# Altium PCB Main.PcbDoc
Units mil, origin at the board's own origin, x right, y up, seen from the top; angles counter-clockwise.
Board outline 3600 x 800 mil, 2 copper layers (Top Layer, Bottom Layer); 19 components, 18 nets, 68 pads, 12 vias.
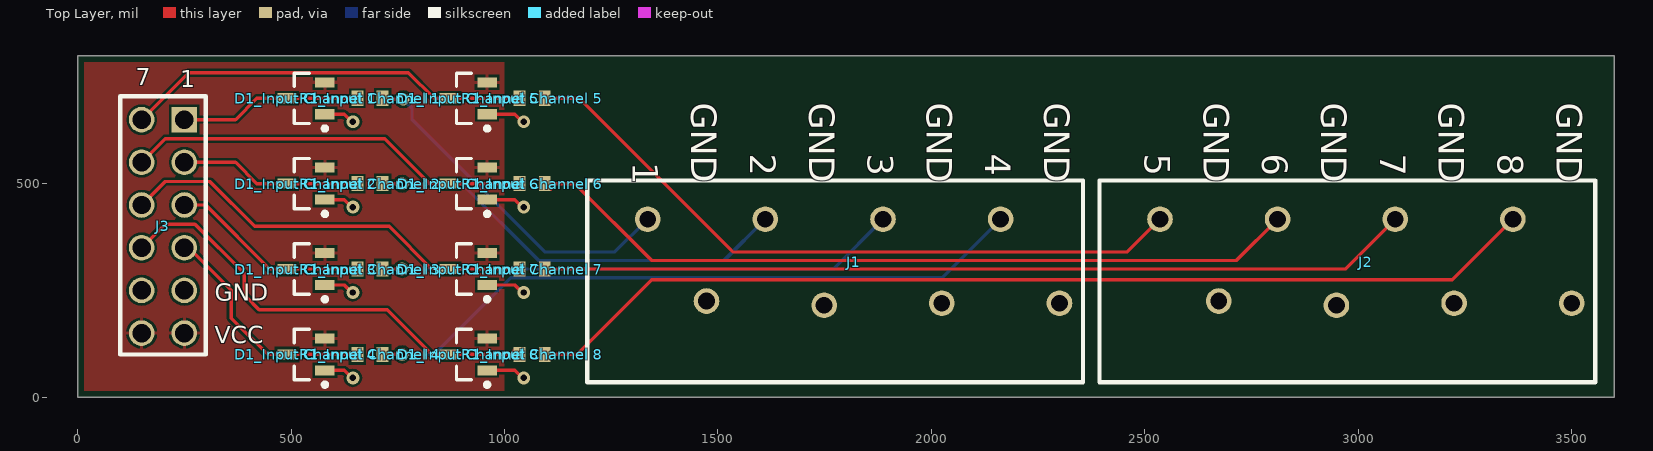
[diagram p0: Top Layer view]
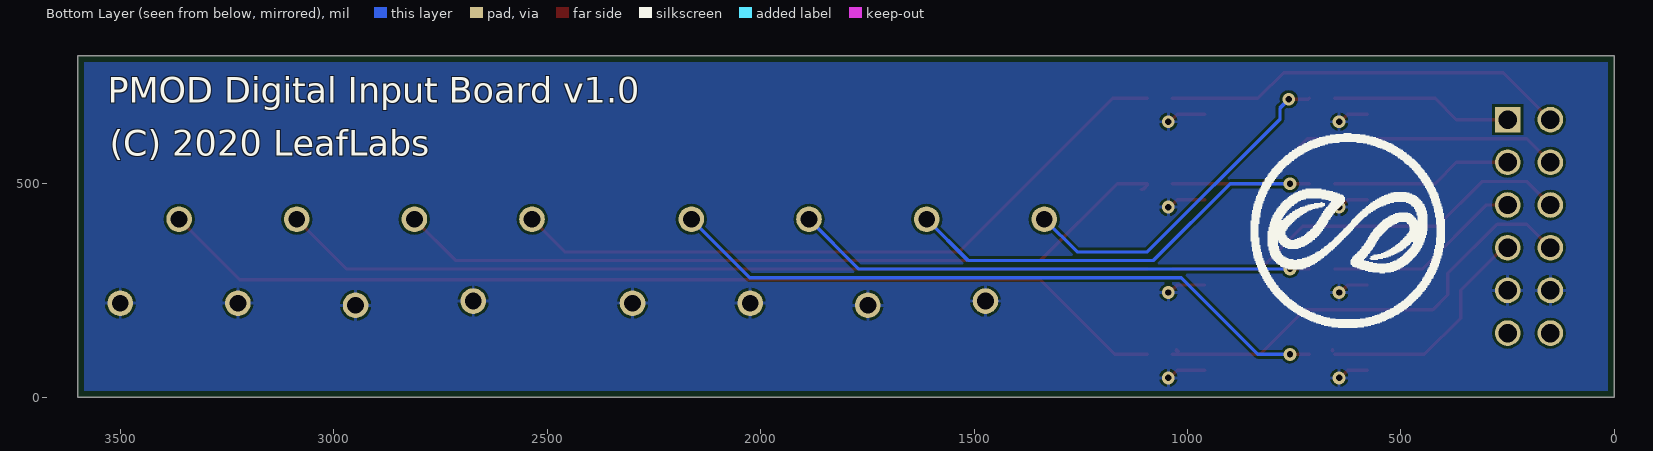
[diagram p1: Bottom Layer view, seen from below]

## Layer stack, top to bottom
Top Solder: solder mask 0.4, Solder Resist, Dk 3.5
Top Layer: signal copper 1.4
Dielectric 1: dielectric 12.6, FR-4, Dk 4.8
Bottom Layer: signal copper 1.4
Bottom Solder: solder mask 0.4, Solder Resist, Dk 3.5

## Board outline
0,0 3600,0 3600,800 0,800

## Design rules (kind name [scope] priority, off if disabled: settings)
BoardOutlineClearance [All] p1: gap=15 ignorepadtopadclearanceinfootprint=FALSE
Clearance [All] p1: gap=6 ignorepadtopadclearanceinfootprint=FALSE except(0: Arc-Hole Track-Hole SMDPad-Hole THPad-Hole Via-Hole Fill-Hole Poly-Hole Region-Hole Text-Hole)
ComponentClearance [All] p1: gap=1 collisioncheckmode=3 verticalgap=1 showdistances=FALSE
DiffPairsRouting [All] p1: maxlimit=393.7 minlimit=6 mostfreqgap=8 toplayer_minwidth=6 toplayer_maxwidth=15 toplayer_prefwidth=8 bottomlayer_minwidth=6 bottomlayer_maxwidth=15 bottomlayer_prefwidth=8 maxuncoupledlength=500
HoleSize [All] p1: absolutevalues=TRUE maxlimit=265 minlimit=13 maxpercent=80.000 minpercent=20.000
HoleToHoleClearance [All] p1: gap=10 allowstackedmicrovias=FALSE
MinimumAnnularRing [All] p1: minimumring=7
MinimumSolderMaskSliver [All] p1: minsoldermaskwidth=0
PlaneClearance [All] p1: clearance=10
PlaneConnect [All] p1: planeconnectstyle=Direct reliefexpansion=16 reliefentries=4 reliefconductorwidth=6 reliefairgap=6
PolygonConnect [All] p1: connectstyle=Relief reliefconductorwidth=8 reliefentries=4 polygonreliefangle="90 Angle" airgapwidth=6
RoomDefinition Main [InComponentClass('Main')] p1: confinementstyle=ConfineOut formatcopy=TRUE lockcomponents=FALSE outline 1150,-1000 3150,-1000 3150,0 1150,0
RoomDefinition "Input Channel 8" [InComponentClass('Input Channel 8')] p2: confinementstyle=ConfineOut formatcopy=TRUE lockcomponents=FALSE outline 1160,-1000 3160,-1000 3160,0 1160,0
RoomDefinition "Input Channel 7" [InComponentClass('Input Channel 7')] p3: confinementstyle=ConfineOut formatcopy=TRUE lockcomponents=FALSE outline 1210,-1000 3210,-1000 3210,0 1210,0
RoomDefinition "Input Channel 6" [InComponentClass('Input Channel 6')] p4: confinementstyle=ConfineOut formatcopy=TRUE lockcomponents=FALSE outline 1200,-1000 3200,-1000 3200,0 1200,0
RoomDefinition "Input Channel 5" [InComponentClass('Input Channel 5')] p5: confinementstyle=ConfineOut formatcopy=TRUE lockcomponents=FALSE outline 1235,-1000 3235,-1000 3235,0 1235,0
RoomDefinition "Input Channel 4" [InComponentClass('Input Channel 4')] p6: confinementstyle=ConfineOut formatcopy=TRUE lockcomponents=FALSE outline 1140,-1000 3140,-1000 3140,0 1140,0
RoomDefinition "Input Channel 3" [InComponentClass('Input Channel 3')] p7: confinementstyle=ConfineOut formatcopy=TRUE lockcomponents=FALSE outline 1255,-1000 3255,-1000 3255,0 1255,0
RoomDefinition "Input Channel 2" [InComponentClass('Input Channel 2')] p8: confinementstyle=ConfineOut formatcopy=TRUE lockcomponents=FALSE outline 1230,-1000 3230,-1000 3230,0 1230,0
RoomDefinition "Input Channel 1" [InComponentClass('Input Channel 1')] p9: confinementstyle=ConfineOut formatcopy=TRUE lockcomponents=FALSE outline 1205,-1000 3205,-1000 3205,0 1205,0
RoutingCorners [All] p1: cornerstyle=45-Degree minsetback=49.21 maxsetback=49.21
RoutingVias [All] p1: holewidth=15 width=30 viastyle="Through Hole" minholewidth=13 minwidth=27 maxholewidth=100 maxwidth=114
SilkToSilkClearance [All] p1: silktosilkclearance=0
SilkToSolderMaskClearance [IsPad] p1: minsilkscreentomaskgap=6 clearancetoexposedcopper=TRUE
SolderMaskExpansion [All] p1: expansion=2.95 istentingtop=FALSE
Width [All] p1: maxlimit=400 minlimit=6 preferedwidth=8
20 further rules are at their usual default settings.

## Classes and differential pairs
channel class digital_input_shifter: "Input Channel 1" "Input Channel 2" "Input Channel 3" "Input Channel 4" "Input Channel 5" "Input Channel 6" "Input Channel 7" "Input Channel 8"
component class Main: J1 J2 J3
component class "Input Channel 8": "D1_Input Channel 8" "R1_Input Channel 8"
component class "Input Channel 7": "D1_Input Channel 7" "R1_Input Channel 7"
component class "Input Channel 6": "D1_Input Channel 6" "R1_Input Channel 6"
component class "Input Channel 5": "D1_Input Channel 5" "R1_Input Channel 5"
component class "Input Channel 4": "D1_Input Channel 4" "R1_Input Channel 4"
component class "Input Channel 3": "D1_Input Channel 3" "R1_Input Channel 3"
component class "Input Channel 2": "D1_Input Channel 2" "R1_Input Channel 2"
component class "Input Channel 1": "D1_Input Channel 1" "R1_Input Channel 1"

## Components (designator, comment, footprint, x,y, rotation, side; value= is the part's Value field where it differs from the comment)
"D1_Input Channel 1" "SDM40E20LS-7-F" SOT-23_N 535,700 r180 top (schematic designator D1)
"D1_Input Channel 2" "SDM40E20LS-7-F" SOT-23_N 535,500 r180 top (schematic designator D1)
"D1_Input Channel 3" "SDM40E20LS-7-F" SOT-23_N 535,300 r180 top (schematic designator D1)
"D1_Input Channel 4" "SDM40E20LS-7-F" SOT-23_N 535,100 r180 top (schematic designator D1)
"D1_Input Channel 5" "SDM40E20LS-7-F" SOT-23_N 915,700 r180 top (schematic designator D1)
"D1_Input Channel 6" "SDM40E20LS-7-F" SOT-23_N 915,500 r180 top (schematic designator D1)
"D1_Input Channel 7" "SDM40E20LS-7-F" SOT-23_N 915,300 r180 top (schematic designator D1)
"D1_Input Channel 8" "SDM40E20LS-7-F" SOT-23_N 915,100 r180 top (schematic designator D1)
J1 "Phoenix Teminal Block" PHOENIX_8 2300,220 r270 top
J2 "Phoenix Teminal Block" PHOENIX_8 3500,220 r270 top
J3 "PMOD" PMOD_6x2_male 250,650 r0 top
"R1_Input Channel 1" "Res3" J1-0603 685,700 r180 top value=470 (schematic designator R1)
"R1_Input Channel 2" "Res3" J1-0603 685,500 r180 top value=470 (schematic designator R1)
"R1_Input Channel 3" "Res3" J1-0603 685,300 r180 top value=470 (schematic designator R1)
"R1_Input Channel 4" "Res3" J1-0603 685,100 r180 top value=470 (schematic designator R1)
"R1_Input Channel 5" "Res3" J1-0603 1065,700 r180 top value=470 (schematic designator R1)
"R1_Input Channel 6" "Res3" J1-0603 1065,500 r180 top value=470 (schematic designator R1)
"R1_Input Channel 7" "Res3" J1-0603 1065,300 r180 top value=470 (schematic designator R1)
"R1_Input Channel 8" "Res3" J1-0603 1065,100 r180 top value=470 (schematic designator R1)

## Footprints (in the part's own frame and the unit in brackets; to place one, negate y for a bottom-side part, rotate by r counter-clockwise, add the part's x,y. Pads: shape width x height; smd on the part's side, far side on the other; paste and mask are expansions set on the pad)
J1-0603 [mm] "Chip Resistor, Body 1.6x0.8mm, IPC High Density"
  rect 0.7x0.9 smd: 1(-0.75,0) 2(0.75,0)
  body extent -0.85,-0.48 0.85,0.48, height 0.9
PHOENIX_8 [mm]
  round 1.524 hole 1: 1(-5,-24.5) 2(-0.127,-21) 3(-5,-17.5) 4(0.127,-14) 5(-5,-10.5) 6(0,-7) 7(-5,-3.5) 8(0,0)
  silkscreen extent -7.3,-28.1 4.7,1.4, body extent -7.27,-27.81 4.73,1.69, height 13.1
PMOD_6x2_male [mil]
  rect 60x60 hole 43.31: 1(0,0)
  round 60 hole 43.31: 2(0,-100) 3(0,-200) 4(0,-300) 5(0,-400) 6(0,-500) 7(-100,0) 8(-100,-100) 9(-100,-200) 10(-100,-300) 11(-100,-400) 12(-100,-500)
  silkscreen extent -150,-550 50,55, body extent -495,-550 13,50, height 200
SOT-23_N [mm] "SOT23, 3-Leads, Body 2.9x1.3mm, Pitch 0.95mm, Lead Span 2.5mm, IPC Medium Density"
  rect 1.15x0.6 smd: 1(-1.125,0.95) 2(-1.125,-0.95) 3(1.125,0)
  silkscreen extent -1.25,-1.5 0.7,1.92, body extent -0.7,-1.5 0.7,1.5, height 1.1

## Part data
"D1_Input Channel 1" "D1_Input Channel 2" "D1_Input Channel 3" "D1_Input Channel 4" "D1_Input Channel 5" "D1_Input Channel 6" "D1_Input Channel 7" "D1_Input Channel 8": "SDM40E20LS-7-F schottky series pair diode.", Supplier Part Number 1=SDM40E20LS-FDICT-ND, Supplier 1=Digi-Key
J1 J2: Supplier Part Number 1=277-1628-ND, Supplier 1=Digi-Key
J3: library part "PMOD Male 2-row", "2x6 PMOD right angle board connector."
"R1_Input Channel 1" "R1_Input Channel 2" "R1_Input Channel 3" "R1_Input Channel 4" "R1_Input Channel 5" "R1_Input Channel 6" "R1_Input Channel 7" "R1_Input Channel 8": "Resistor", Supplier Part Number 1=P470BZCT-ND, LatestRevisionDate=29-May-2009, LatestRevisionNote="IPC-7351 Footprint Added.", PackageDescription="Chip Resistor", PackageReference=J1-0603, Published=8-Jun-2000, Publisher="Altium Limited", Supplier 1=Digi-Key

## Via types
v1: diameter 30, hole 15, Top Layer to Bottom Layer, tented both sides, 12 vias

## Nets (pads, with @x,y where several pads share a name; then routed paths per layer and width w, separated by ;. In a path a pad name is that pad's centre, name@x,y a point inside that pad or via, vN(x,y) a via of type N, cw(c..) or ccw(c..) an arc to the next point about the centre after c; other vN are vias at no path point)
3.3V: "D1_Input Channel 1.2" "D1_Input Channel 2.2" "D1_Input Channel 3.2" "D1_Input Channel 4.2" "D1_Input Channel 5.2" "D1_Input Channel 6.2" "D1_Input Channel 7.2" "D1_Input Channel 8.2" J3.6 J3.12
GND: "D1_Input Channel 1.1" "D1_Input Channel 2.1" "D1_Input Channel 3.1" "D1_Input Channel 4.1" "D1_Input Channel 5.1" "D1_Input Channel 6.1" "D1_Input Channel 7.1" "D1_Input Channel 8.1" J1.2 J1.4 J1.6 J1.8 J2.2 J2.4 J2.6 J2.8 J3.5 J3.11 | length 664
  Top Layer w8: 579.29,62.6 624.41,62.6 642.01,45 v1(645,45) ; 579.29,262.6 624.41,262.6 642.01,245 v1(645,245) ; 579.29,462.6 624.41,462.6 642.01,445 v1(645,445) ; 579.29,662.6 624.41,662.6 642.01,645 v1(645,645) ; 959.29,62.6 1024.41,62.6 1042.01,45 v1(1045,45) ; 959.29,262.6 1024.41,262.6 1042.01,245 v1(1045,245) ; 959.29,462.6 1024.41,462.6 1042.01,445 v1(1045,445) ; 959.29,662.6 1024.41,662.6 1042.01,645 v1(1045,645)
"NetD1_Input Channel 1_3": "D1_Input Channel 1.3" "R1_Input Channel 1.2" J3.1 | length 426.2
  Top Layer w8: J3.1 370,650 420,700 579.29,700 655.47,700
"NetD1_Input Channel 2_3": "D1_Input Channel 2.3" "R1_Input Channel 2.2" J3.2 | length 426.2
  Top Layer w8: J3.2 370,550 420,500 579.29,500 655.47,500
"NetD1_Input Channel 3_3": "D1_Input Channel 3.3" "R1_Input Channel 3.2" J3.3 | length 467.6
  Top Layer w8: J3.3 300,450 450,300 579.29,300 655.47,300
"NetD1_Input Channel 4_3": "D1_Input Channel 4.3" "R1_Input Channel 4.2" J3.4 | length 547.1
  Top Layer w8: J3.4 260,350 360,250 360,185 445,100 579.29,100 655.47,100
"NetD1_Input Channel 5_3": "D1_Input Channel 5.3" "R1_Input Channel 5.2" J3.7 | length 955.9
  Top Layer w8: J3.7 260,760 775,760 835,700 959.29,700 1035.47,700
"NetD1_Input Channel 6_3": "D1_Input Channel 6.3" "R1_Input Channel 6.2" J3.8 | length 951.7
  Top Layer w8: J3.8 205,605 720,605 825,500 959.29,500 1035.47,500
"NetD1_Input Channel 7_3": "D1_Input Channel 7.3" "R1_Input Channel 7.2" J3.9 | length 993.2
  Top Layer w8: J3.9 205,505 310,505 415,400 730,400 830,300 959.29,300 1035.47,300
"NetD1_Input Channel 8_3": "D1_Input Channel 8.3" "R1_Input Channel 8.2" J3.10 | length 1067.7
  Top Layer w8: J3.10 205,405 275,405 390,290 390,239.69 394.69,235 395,235 425,205 725,205 830,100 959.29,100 1035.47,100
  Top Layer w10: 1022.87,107.4 1025.47,110
NetJ1_1: "R1_Input Channel 1.1" J1.1 | length 817.1
  Top Layer w8: 714.53,700 716.82,697.7 v1(762.96,697.7)
  Bottom Layer w8: v1(762.96,697.7) 783.41,677.26 783.41,651.24 1094.64,340 1258.58,340 J1.1
NetJ1_3: "R1_Input Channel 2.1" J1.3 | length 1011.2
  Top Layer w8: 714.53,500 v1(760,500)
  Bottom Layer w8: v1(760,500) 900,500 1080,320 1514.17,320 J1.3
NetJ1_5: "R1_Input Channel 3.1" J1.5 | length 1220.5
  Top Layer w8: 714.53,300 v1(760,300)
  Bottom Layer w8: v1(760,300) 1769.76,300 J1.5
NetJ1_7: "R1_Input Channel 4.1" J1.7 | length 1578.9
  Top Layer w8: 714.53,100 v1(760,100)
  Bottom Layer w8: v1(760,100) 835,100 1015,280 2025.35,280 J1.7
NetJ2_1: "R1_Input Channel 5.1" J2.1 | length 1621.9
  Top Layer w8: 1094.53,700 1175,700 1535,340 2458.58,340 J2.1
NetJ2_3: "R1_Input Channel 6.1" J2.3 | length 1852.9
  Top Layer w8: 1108.24,486.28 1104.31,486.28 1094.53,496.06 1094.53,500 1140,500 1165,500 1345,320 2714.17,320 J2.3
NetJ2_5: "R1_Input Channel 7.1" J2.5 | length 2040.5
  Top Layer w8: 1094.53,300 2969.76,300 J2.5
NetJ2_7: "R1_Input Channel 8.1" J2.7 | length 2398.9
  Top Layer w8: 1094.53,100 1170,100 1345,275 3220.35,275 J2.7

## Polygon pours and split planes (outlines as drawn)
3.3V on Top Layer "3.3V_L01_P010" (solid, pour order 10): 15,15 15,785 1000,785 1000,15
no net on Top Layer "NONET_L01_P000" (solid, pour order 0): 35,780
GND on Bottom Layer "GND_L02_P011" (solid, pour order 11): 15,785 15,15 3585,15 3585,785

## Silkscreen, mask and mechanical layers (free items; w line width, h text height)
Bottom Overlay:
  drawing of 2 lines, arcs and shapes, not listed
  text "PMOD Digital Input Board v1.0" at 3529.56,689.99 h60
  text "(C) 2020 LeafLabs" at 3525,565 h60
Mechanical 1:
  the board outline again, w1

## Text inside footprints (layer, text, board x,y; h text height)
J1: Top Overlay "1" at 1300,549.99 h60 r270; Top Overlay "GND" at 1437.8,689.95 h60 r270; Top Overlay "2" at 1575.59,569.99 h60 r270; Top Overlay "GND" at 1713.39,689.95 h60 r270; Top Overlay "3" at 1851.18,569.99 h60 r270; Top Overlay "GND" at 1988.98,689.95 h60 r270; Top Overlay "4" at 2126.77,569.99 h60 r270; Top Overlay "GND" at 2264.57,689.95 h60 r270
J2: Top Overlay "5" at 2500,569.99 h60 r270; Top Overlay "GND" at 2637.8,689.95 h60 r270; Top Overlay "6" at 2775.59,569.99 h60 r270; Top Overlay "GND" at 2913.39,689.95 h60 r270; Top Overlay "7" at 3051.18,569.99 h60 r270; Top Overlay "GND" at 3188.98,689.95 h60 r270; Top Overlay "8" at 3326.77,569.99 h60 r270; Top Overlay "GND" at 3464.57,689.95 h60 r270
J3: Top Overlay "7" at 136,731 h40; Top Overlay "1" at 241,726 h40; Top Overlay "VCC" at 321,126 h40; Top Overlay "GND" at 321,226 h40